# Altium PCB pixhawk_debug_adapter_mini.PcbDoc
Units mm, origin at the board's own origin, x right, y up, seen from the top; angles counter-clockwise.
Board outline 60 x 35 mm, 2 copper layers (Top Layer, Bottom Layer), stack 1.57 mm thick; 25 components, 30 nets, 130 pads, 220 vias.
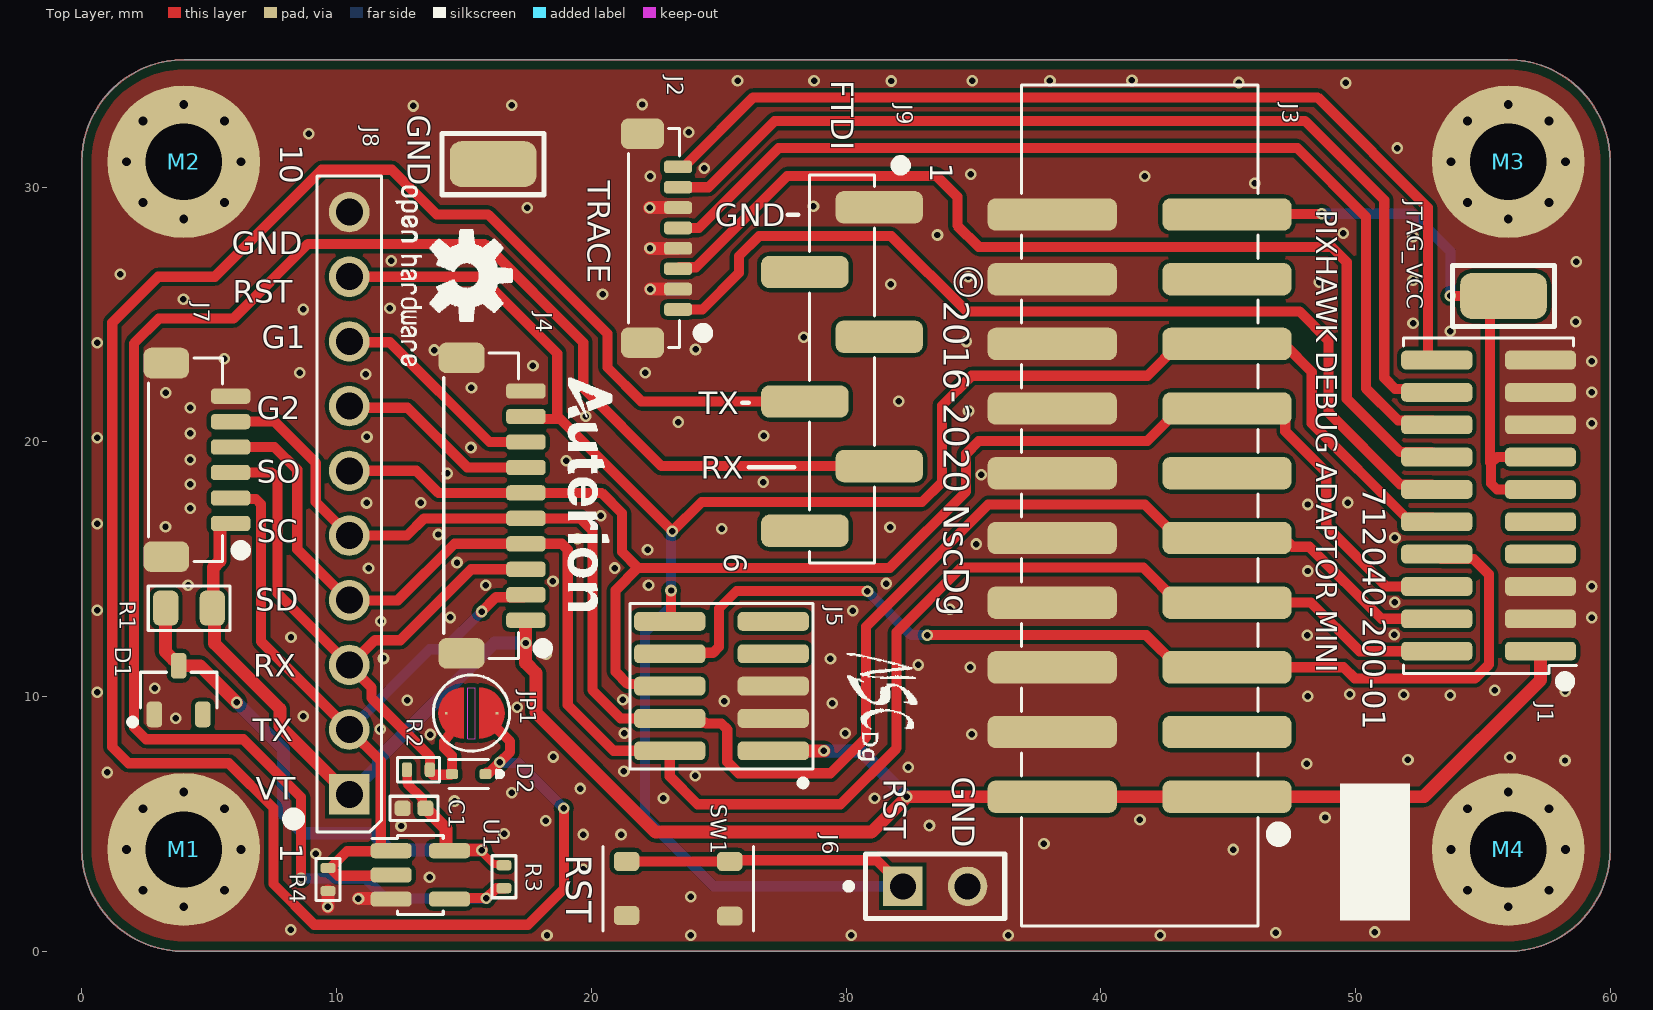
[diagram p0: Top Layer view]
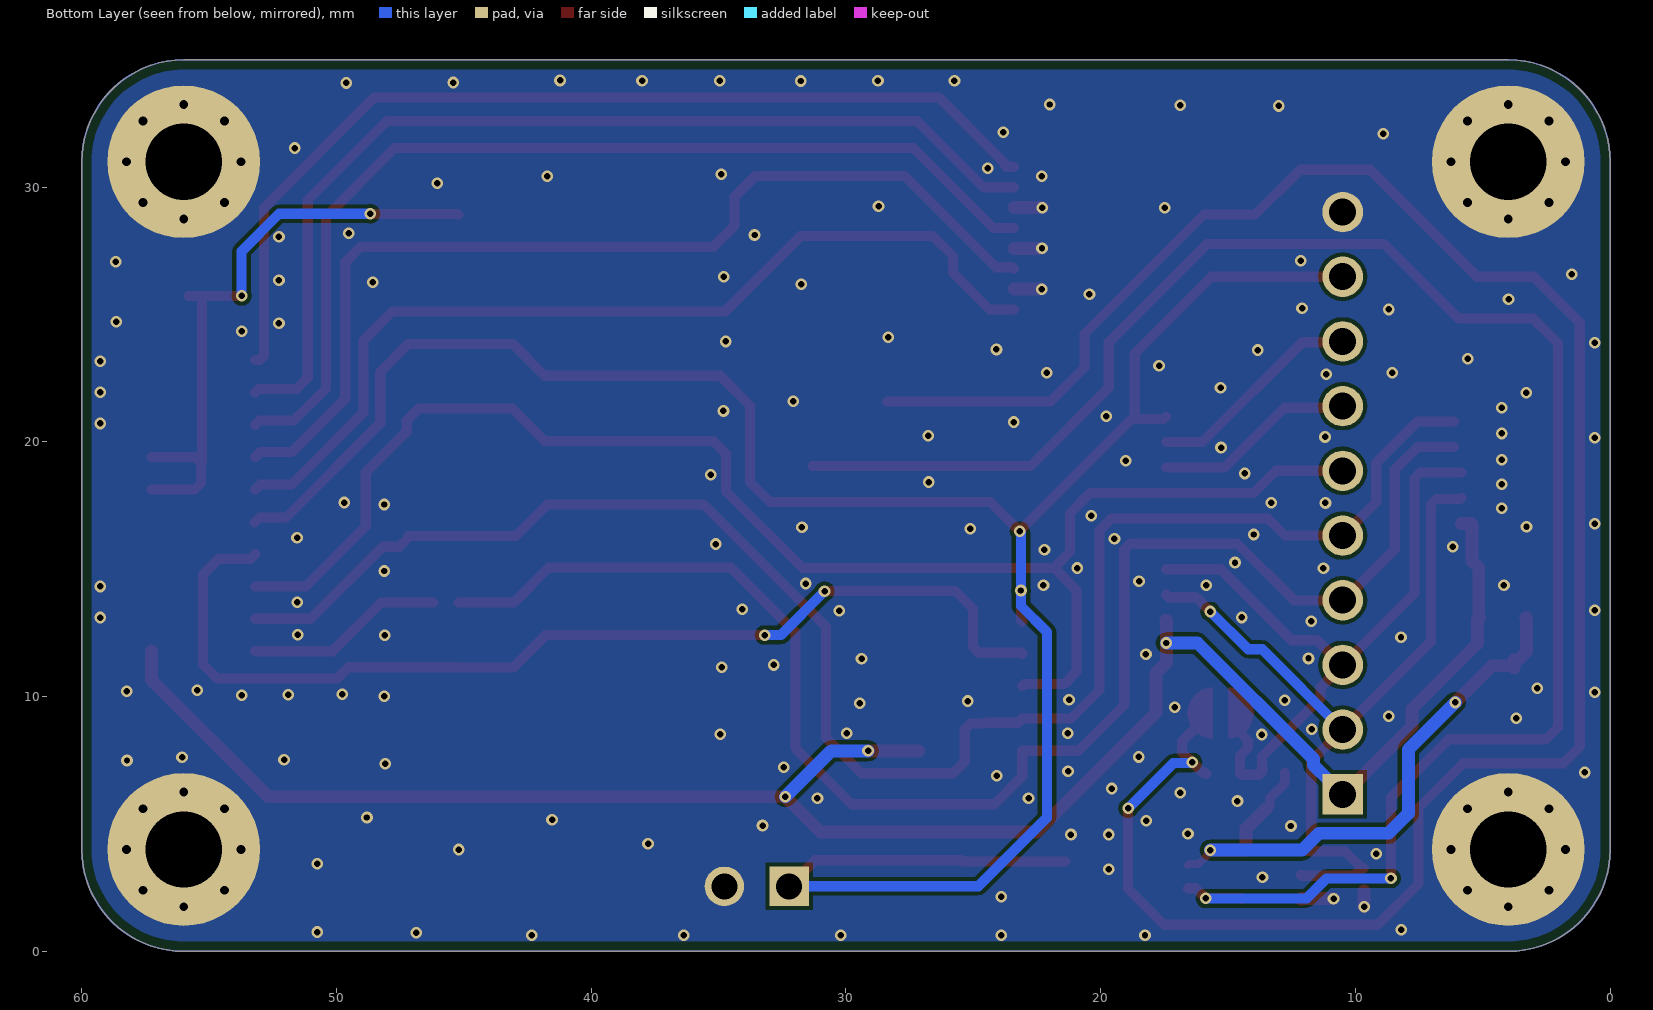
[diagram p1: Bottom Layer view, seen from below]
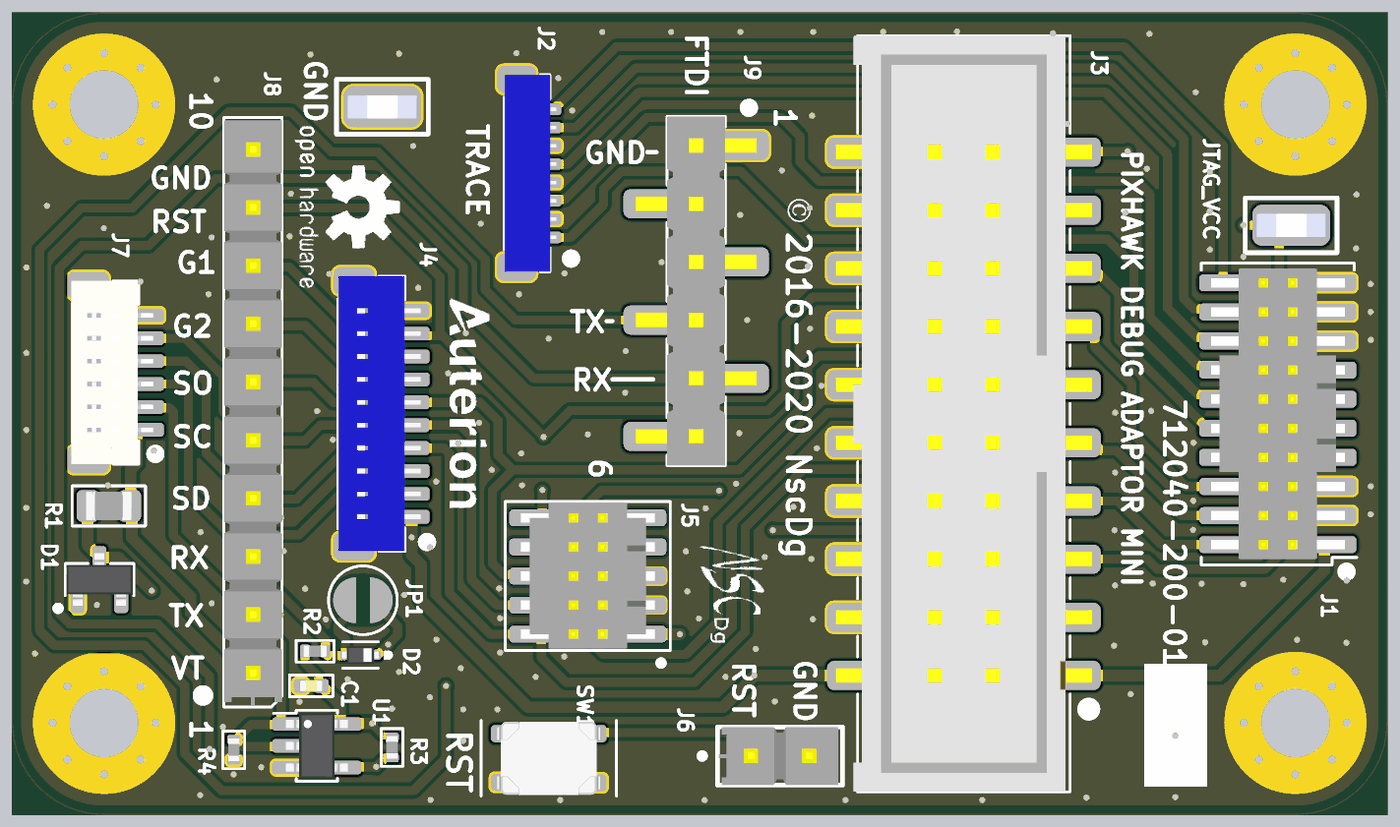
[diagram p2: 3D render of the assembled board from above, using the file's embedded part models]

## Layer stack, top to bottom
Top Solder: solder mask 0.025, Solder Resist, Dk 3.5
Top Layer: signal copper 0.036
Dielectric 1: dielectric 1.498, FR-4, Dk 4.3
Bottom Layer: signal copper 0.036
Bottom Solder: solder mask 0.025, Solder Resist, Dk 3.5

## Board outline
4,0 cw(c4,4) 0,4 0,31 cw(c4,31) 4,35 56,35 cw(c56,31) 60,31 60,4 cw(c56,4) 56,0

## Design rules (kind name [scope] priority, off if disabled: settings)
BoardOutlineClearance [All] p1: gap=0.381 ignorepadtopadclearanceinfootprint=FALSE
Clearance [All] p1: gap=0.152 ignorepadtopadclearanceinfootprint=TRUE
HoleSize [All] p1: absolutevalues=TRUE maxlimit=3.25 minlimit=0.025 maxpercent=80.000 minpercent=20.000
MinimumSolderMaskSliver [All] p1: minsoldermaskwidth=0.09
PolygonConnect PolygonConnect__mount_hole [InNet('GND') vs HasFootprint('MOUNT_HOLE_3MM_8VIA_TH')] p1: connectstyle=Direct reliefconductorwidth=0.3 reliefentries=4 polygonreliefangle="90 Angle" airgapwidth=0.254
PolygonConnect PolygonConnect__via [InNet('GND') vs IsVia] p2: connectstyle=Direct reliefconductorwidth=0.3 reliefentries=4 polygonreliefangle="90 Angle" airgapwidth=0.254
PolygonConnect [All] p3: connectstyle=Direct reliefconductorwidth=0.3 reliefentries=4 polygonreliefangle="90 Angle" airgapwidth=0.254
RoutingVias [All] p1: holewidth=0.305 width=0.508 viastyle="Through Hole" minholewidth=0.254 minwidth=0.457 maxholewidth=0.508 maxwidth=1.016
SilkToSolderMaskClearance [IsPad] p1: minsilkscreentomaskgap=0.1 clearancetoexposedcopper=TRUE
SolderMaskExpansion [All] p1: expansion=0.102 istentingtop=FALSE
UnRoutedNet [All] p1: checkbadconnections=TRUE
Width [All] p1: maxlimit=2.54 minlimit=0.152 preferedwidth=0.305 minimp=50.000000 maximp=50.000000 favimp=50.000000
26 further rules are at their usual default settings.

## Components (designator, comment, footprint, x,y, rotation, side; value= is the part's Value field where it differs from the comment)
C1 "CAP CER 0.1UF 10% 50V X5R 0402" CAPC100X50X56L25N 13.04,5.614 r180 top value=0.1uF
D1 "DIODE ZENER 5.1V 225MW SOT23-3" SOT23-3P95_230X110L30X43N_DIODE 3.799,10.258 r0 top
D2 "DIODE SCHOTTKY 70V 70MA SOD523" SODFL120X80X70L30X30 15.19,6.961 r180 top
GND "TESTPOINT MINIATURE SMD" KSTN-5015 16.145,30.905 r180 top
J1 "CONN_HDR_2X10_VERT_SHROUD_FTSH_1.27MM_SMT" SAMTEC_FTSH-110-01-L-DV-K-TR 55.23,17.5 r90 top locked
J2 "CONN HEADER SUR 8POS .8MM VERT SMT" JST_BM08B-SURS-TFLFSN 22.708,28 r90 top locked
J3 "CONN_HDR_2X10_MALE_2.54MM_SHR_SAMTEC_SMD" SAMTEC_HTST-110-01-F-DV 41.529,17.5 r90 top locked
J4 "CONN HEADER SH 10POS TOP 1MM TIN" JST_BM10B-SRSS-TB 15.67,17.5 r90 top locked
J5 "CONN HEADER 10POS DUAL .05\" SMD" FTSH-105-01-XXX-DV-K 25.112,10.414 r90 top locked
J6 "CONN HEADER 2POS 0.100\" (2.54mm) TH" SMTC-TSW-102-26-XX-S 33.503,2.553 r0 top locked
J7 "CONN HEADER SH 6POS TOP 1MM TIN" JST_BM06B-SRSS-TB 4.064,19.298 r90 top locked
J8 "CONN HEADER 0.100\" (2.54mm) 10POS VERT TH" HDRV10W64P254_10X1_2054X254H851 10.5,6.165 r90 top locked
J9 "CONN HEADER 6POS 0.100\" (2.54mm) SMD" SAMTEC_TSM-106-01-XX-SV 29.845,22.86 r90 top locked
JP1 "JUMPER SHORTING BAR 2MM PAD" SHORTING_JUMPER_2MM 15.298,9.355 r180 top
JTAG_VCC "TESTPOINT MINIATURE SMD" KSTN-5015 55.814,25.731 r180 top
M1 "MOUNT HOLE 3MM 8VIAS THMOUNT_HOLE_3MM_TH" MOUNT_HOLE_3MM_8VIA_TH 4,4 r0 top locked
M2 "MOUNT HOLE 3MM 8VIAS THMOUNT_HOLE_3MM_TH" MOUNT_HOLE_3MM_8VIA_TH 4,31 r0 top locked
M3 "MOUNT HOLE 3MM 8VIAS THMOUNT_HOLE_3MM_TH" MOUNT_HOLE_3MM_8VIA_TH 56,31 r0 top locked
M4 "MOUNT HOLE 3MM 8VIAS THMOUNT_HOLE_3MM_TH" MOUNT_HOLE_3MM_8VIA_TH 56,4 r0 top locked
R1 "RES SMD 68 OHM 1% 1/8W 0805" RESC200X125X70L40N 4.207,13.474 r180 top value=68R
R2 "RES SMD 10K OHM 1% 1/16W 0402" RESC100X50X40L25 13.211,7.131 r0 top value=10K
R3 "RES SMD 10K OHM 1% 1/16W 0402" RESC100X50X40L25 16.571,2.929 r270 top value=10K
R4 "RES SMD 100K OHM 1% 1/16W 0402" RESC100X50X40L25 9.662,2.822 r270 top value=100K
SW1 "SWITCH TACTILE SPST-NO 0.05A 12V SMT" SWITCH_SON4P450_420X320X250L75X100N 23.411,2.457 r270 top locked
U1 "IC GATE AND 1CH 2-INP 5-TSOP" SOT23-5P95_270X145L35X35N 13.289,3 r0 top locked

## Footprints (in the part's own frame and the unit in brackets; to place one, negate y for a bottom-side part, rotate by r counter-clockwise, add the part's x,y. Pads: shape width x height; smd on the part's side, far side on the other; paste and mask are expansions set on the pad)
CAPC100X50X56L25N [mm] "Capacitor Chip 1.00 mm L X 0.50 mm W X 0.56 mm H body"
  rrect49% 0.63x0.61 smd: 1(-0.45,0) 2(0.45,0)
  silkscreen extent -0.95,-0.48 0.95,0.48, body extent -0.5,-0.25 0.5,0.25, height 0.56
FTSH-105-01-XXX-DV-K [mil] "Header Vertical 2X5 Pins 1.27MM Pitch SMD"
  rrect50% 29x110 smd mask+2: 1(-100,-80) 2(-100,80) 3(-50,-80) 4(-50,80) 5(0,-80) 6(0,80) 7(50,-80) 8(50,80) 9(100,-80) 10(100,80)
  silkscreen extent -155,-142 128,142, body extent -125,-115 125,115, height 241
HDRV10W64P254_10X1_2054X254H851 [mm] "Header, Vertical, 2.54 mm pitch; 0.64 mm lead width, 10 pins, 1 row, 10 pins per row, 20.54 mm L X 2.54 mm W X 8.51 mm H body"
  rect 1.59x1.59 / inner round 1.59 / far side rect 1.59x1.59 hole 1.06 paste-1.59: 1(0,0)
  round 1.59 hole 1.06 paste-1.59: 2(2.54,0) 3(5.08,0) 4(7.62,0) 5(10.16,0) 6(12.7,0) 7(15.24,0) 8(17.78,0) 9(20.32,0) 10(22.86,0)
  silkscreen extent -1.48,-1.27 24.28,1.27, body extent -1.38,-1.27 24.15,1.27, height 8.38
JST_BM06B-SRSS-TB [mm] "Header, Vertical Plug; 6 pin, 8.00 mm L X 2.90 mm W X 4.35 mm H body"
  rrect50% 0.6x1.55 smd: 1(-2.5,-1.775) 2(-1.5,-1.775) 3(-0.5,-1.775) 4(0.5,-1.775) 5(1.5,-1.775) 6(2.5,-1.775)
  rrect50% 1.2x1.8 smd: M1(-3.8,0.75) M2(3.8,0.75)
  silkscreen extent -4,-2.38 4,1.45, body extent -4,-2.1 4,1.5, height 4.25
JST_BM08B-SURS-TFLFSN [mm] "Connector, Vertical Shrouded Plug; 10 pin, 9.60 mm L X 2.00 mm W X 2.80 mm H body"
  rrect50% 0.5x1.1 smd: 1(-2.8,-0.7) 2(-2,-0.7) 3(-1.2,-0.7) 4(-0.4,-0.7) 5(0.4,-0.7) 6(1.2,-0.7) 7(2,-0.7) 8(2.8,-0.7)
  rrect50% 1.2x1.7 smd: M1(-4.1,0.7) M2(4.1,0.7)
  silkscreen extent -4.3,-1.88 4.3,1.25, body extent -4.3,-1.03 4.3,1.22, height 2.75
JST_BM10B-SRSS-TB [mm] "Connector, Vertical Shrouded Plug; 12 pin, 12.00 mm L X 2.9mm W X 6.30 mm H body"
  rrect50% 0.6x1.55 smd: 1(-4.5,-1.762) 2(-3.5,-1.762) 3(-2.5,-1.762) 4(-1.5,-1.762) 5(-0.5,-1.762) 6(0.5,-1.762) 7(1.5,-1.762) 8(2.5,-1.762) 9(3.5,-1.762) 10(4.5,-1.762)
  rrect50% 1.2x1.8 smd: M1(-5.8,0.763) M2(5.8,0.763)
  silkscreen extent -6,-2.62 6,1.46, body extent -6,-2.15 6,1.45, height 4.25
KSTN-5015 [mm] "Test Point, Dia 2.7MM x 1.0MM"
  rrect50% 3.4x1.8 smd: 1(0,0)
  silkscreen extent -2,-1.2 2,1.2, body extent -1.56,-0.51 1.56,0.51, height 1.52
MOUNT_HOLE_3MM_8VIA_TH [mm] "MOUNT HOLE 3MM 8VIA TH"
  round 6 hole 3: 1(0,0)
RESC100X50X40L25 [mm] "Resistor, Chip; 1.00 mm L X 0.50 mm W X 0.40 mm H body"
  rrect50% 0.4x0.58 smd: 1(-0.45,0) 2(0.45,0)
  silkscreen extent -0.82,-0.48 0.82,0.48, body extent -0.5,-0.25 0.5,0.25, height 0.4
RESC200X125X70L40N [mm] "Resistor, Chip; 2.00 mm L X 1.25 mm W X 0.70 mm H body"
  rrect51% 0.99x1.38 smd: 1(-0.915,0) 2(0.915,0)
  silkscreen extent -1.6,-0.87 1.6,0.87, body extent -1,-0.63 1,0.63, height 0.7
SAMTEC_FTSH-110-01-L-DV-K-TR [mil] "Connector, Vertical Plug; 20 pin, 12.83 mm L X 5.8 mm W X 10.29 mm H body"
  rrect50% 29.02x110 smd: 1(-225,-80.16) 2(-225,80.16) 3(-175,-80.16) 4(-175,80.16) 5(-125,-80.16) 6(-125,80.16) 7(-75,-80.16) 8(-75,80.16) 9(-25,-80.16) 10(-25,80.16) 11(25,-80.16) 12(25,80.16) 13(75,-80.16) 14(75,80.16) 15(125,-80.16) 16(125,80.16) 17(175,-80.16) 18(175,80.16) 19(225,-80.16) 20(225,80.16)
  silkscreen extent -280,-136 259,131, body extent -250,-115 250,115, height 241
SAMTEC_HTST-110-01-F-DV [mm] "Connector, Vertical Shrouded Plug; 20 pin, 33.02 mm L X 9.27 mm W X 10.41 mm H body"
  rrect50% 1.27x5.08 smd: 1(-11.43,-3.43) 2(-11.43,3.43) 3(-8.89,-3.43) 4(-8.89,3.43) 5(-6.35,-3.43) 6(-6.35,3.43) 7(-3.81,-3.43) 8(-3.81,3.43) 9(-1.27,-3.43) 10(-1.27,3.43) 11(1.27,-3.43) 12(1.27,3.43) 13(3.81,-3.43) 14(3.81,3.43) 15(6.35,-3.43) 16(6.35,3.43) 17(8.89,-3.43) 18(8.89,3.43) 19(11.43,-3.43) 20(11.43,3.43)
  silkscreen extent -16.51,-5.7 16.51,4.64, body extent -16.51,-5.59 16.51,5.59, height 10.16
SAMTEC_TSM-106-01-XX-SV [mil] "Header, Vertical Plug; 6 pin, 15.24 mm L X 2.54 mm W X 8.382 mm H body"
  rrect50% 50x135 smd: 1(250,-57.5) 2(150,57.5) 3(50,-57.5) 4(-50,57.5) 5(-150,-57.5) 6(-250,57.5)
  silkscreen extent -300,-98 323,50, body extent -300,-104 300,104, height 379
SHORTING_JUMPER_2MM [mm] "SHORTING JUMPER PADS 2MM SMD"
  rect 0.1x0.1 smd paste+0 mask+0: 1(-1,0) 2(1,0)
  Top Layer region: -0.3,1 -0.3,-1 -0.683,-0.924 -1.007,-0.707 -1.224,-0.383 -1.3,0 -1.3,0 -1.224,0.383 -1.007,0.707 -0.683,0.924 -0.3,1
  Top Layer region: 0.3,1 0.683,0.924 1.007,0.707 1.224,0.383 1.3,0 1.3,0 1.224,-0.383 1.007,-0.707 0.683,-0.924 0.3,-1 0.3,-1
  Top Layer keep-out lines w0.025: 0.15,1 -0.15,1 -0.15,-1 0.15,-1 0.15,1
  silkscreen extent -1.5,-1.5 1.5,1.5
SMTC-TSW-102-26-XX-S [mm] ".025 SQ Post Terminal Strip Assembly, 1x2 Pins, Vertical, 2.54mm Pitch, Male TH"
  rect 1.55x1.55 hole 1.02: 1(-1.27,0)
  round 1.55 hole 1.02: 2(1.27,0)
  silkscreen extent -3.52,-1.27 2.73,1.27, body extent -2.67,-1.27 2.54,1.27, height 8.38
SODFL120X80X70L30X30 [mm] "Diode Small Outline Diode Flat Lead SODFL 1.20 mm L X 0.80 mm W X 0.70 mm H"
  rrect50% 0.48x0.4 smd: A(0.66,0) C(-0.66,0)
  silkscreen extent -1.32,-0.58 0.77,0.58, body extent -0.8,-0.4 0.8,0.4, height 0.7
SOT23-3P95_230X110L30X43N_DIODE [mm] "Small Outline Transistor (SOT23), 0.95 mm pitch; 3 pin, 2.90 mm L X 1.30 mm W X 1.10 mm H body"
  rrect49% 0.61x1.01 smd: 1(-0.95,-0.955) 2(0.95,-0.955) 3(0,0.955)
  silkscreen extent -1.93,-1.38 1.5,0.7, body extent -1.45,-1.15 1.45,1.15, height 1.1
SOT23-5P95_270X145L35X35N [mm] "Small Outline Transistor (SOT23), 0.95 mm pitch; 5 pin, 2.90 mm L X 1.55 mm W X 1.45 mm H body"
  rrect51% 1.61x0.59 smd: 1(-1.145,0.95) 2(-1.145,0) 3(-1.145,-0.95) 4(1.145,-0.95) 5(1.145,0.95)
  silkscreen extent -1.89,-1.55 0.9,1.55, body extent -1.35,-1.45 1.35,1.45, height 1.45
SWITCH_SON4P450_420X320X250L75X100N [mm] "Small Outline No-Lead (SON), 4.50 mm pitch; 4 pin, 4.20 mm L X 3.20 mm W X 2.50 mm H body"
  rrect48% 0.75x1 smd: 1(-1.075,2.025) 2(-1.075,-2.025) 3(1.075,2.025) 4(1.05,-2.025)
  silkscreen extent -1.65,-2.96 1.65,2.96, body extent -1.6,-2.25 1.6,2.25, height 2.5

## Part data
C1: library part CAP_0U1_50V_X5R_0402, Manufacturer="Murata Electronics North America", Manufacturer Part Number=GRM155R61H104KE19D, Operating Temperature="-55°C ~ 85°C", Supplier Part Number 1=490-11917-1-ND, Tolerance=±10%, Voltage - Rated=50V, Category=Capacitors, ComponentLink1Description=https://www.digikey.com/products/en/capacitors/ceramic-capacitors/60?k=GRM155R61H104KE19D&k=&pkeyword=GRM155R61H104KE19D&pv7=2&sf=0&quantity=&ColumnSort=0&page=1&pageSize=25, ComponentLink1URL=https://www.digikey.com/products/en/capacitors/ceramic-capacitors/60?k=GRM155R61H104KE19D&k=&pkeyword=GRM155R61H104KE19D&pv7=2&sf=0&quantity=&ColumnSort=0&page=1&pageSize=25, Packaging="Cut Tape (CT)", Part Status=Active, Pricing 1="1=0.1, 10=0.065, 100=0.0292, 500=0.02082, 1000=0.01637, 2500=0.01488, 5000=0.01369 (USD)", Stock 1=1608921, Supplier 1=Digi-Key
D1: library part DIODE_ZENER_5.1V_SOT23-3, Manufacturer="ON Semiconductor", Manufacturer Part Number=BZX84C5V1LT3G, Operating Temperature="-65°C ~ 150°C (TJ)", Supplier Part Number 1=BZX84C5V1LT3GOSCT-ND, Category="Circuit Protection", ComponentLink1Description=https://www.digikey.com/product-detail/en/on-semiconductor/BZX84C5V1LT3G/BZX84C5V1LT3GOSCT-ND/3462252, ComponentLink1URL=https://www.digikey.com/product-detail/en/on-semiconductor/BZX84C5V1LT3G/BZX84C5V1LT3GOSCT-ND/3462252, ID="5.1V 6%", Packaging="Cut Tape (CT)", Part Status=Active, Pricing 1="1= 0.13 (USD)", Stock 1=21912, Supplier 1=Digi-Key
D2: library part DIODE_SCHOTTKY_BAS70_SOD523_SMT, Current=70mA, Manufacturer=STMicroelectronics, Manufacturer Part Number=BAS70KFILM, Supplier Part Number 1=497-5695-1-ND, Voltage=70V, Category="Discrete Semiconductor Products", ComponentLink1Description=https://www.digikey.com/product-detail/en/stmicroelectronics/BAS70KFILM/497-5695-1-ND/1299948, ComponentLink1URL=https://www.digikey.com/product-detail/en/stmicroelectronics/BAS70KFILM/497-5695-1-ND/1299948, Packaging="Cut Tape (CT)", Part Status=Active, Pricing 1="1=0.28, 10=0.23, 100=0.122, 500=0.08028, 1000=0.05459 (USD)", Stock 1=20067, Supplier 1=Digi-Key
GND JTAG_VCC: library part TESTPOINT_MINIATURE_SMD, Manufacturer="Keystone Electronics", Manufacturer Part Number=5015, Supplier Part Number 1=36-5015CT-ND, Category="Test and Measurement", ComponentLink1Description=https://www.digikey.com/product-detail/en/keystone-electronics/5015/36-5015CT-ND/278886, ComponentLink1URL=https://www.digikey.com/product-detail/en/keystone-electronics/5015/36-5015CT-ND/278886, Supplier 1=Digi-Key
J1: library part CONN_HDR_2X10_SHROUD_1.27MM_SMT, Manufacturer="Samtec Inc.", Manufacturer Part Number=FTSH-110-01-L-DV-K-TR, Operating Temperature="-55°C ~ 125°C", Supplier Part Number 1=SAM13960CT-ND, Category="Connectors, Interconnects", ComponentLink1Description=https://www.digikey.com/products/en/connectors-interconnects/rectangular-connectors-headers-male-pins/314?k=FTSH-110-01-L-DV-K&k=&pkeyword=FTSH-110-01-L-DV-K&sv=0&pv5=362515&sf=0&FV=-8%7C314%2C7%7C2&quantity=&ColumnSort=0&page=1&pageSize=25, ComponentLink1URL=https://www.digikey.com/products/en/connectors-interconnects/rectangular-connectors-headers-male-pins/314?k=FTSH-110-01-L-DV-K&k=&pkeyword=FTSH-110-01-L-DV-K&sv=0&pv5=362515&sf=0&FV=-8%7C314%2C7%7C2&quantity=&ColumnSort=0&page=1&pageSize=25, Packaging="Cut Tape (CT)", Part Status=Active, Pricing 1="1=5.36 (USD)", Stock 1=73, Supplier 1=Digi-Key, System=Connector
J2: library part CONN_JST_SUR_8PIN_VERT_SMT, Manufacturer="JST Sales America Inc.", Manufacturer Part Number=BM08B-SURS-TF(LF)(SN), Operating Temperature="-25°C ~ 85°C", Supplier Part Number 1=455-3578-1-ND, Voltage - Rated=30V, Category="Connectors, Interconnects", ComponentLink1Description=https://www.digikey.com/products/en/connectors-interconnects/rectangular-connectors-headers-male-pins/314?k=bm08bsur&k=&pkeyword=bm08bsur&sv=0&pv7=2&sf=0&quantity=&ColumnSort=0&page=1&pageSize=25, ComponentLink1URL=https://www.digikey.com/products/en/connectors-interconnects/rectangular-connectors-headers-male-pins/314?k=bm08bsur&k=&pkeyword=bm08bsur&sv=0&pv7=2&sf=0&quantity=&ColumnSort=0&page=1&pageSize=25, Packaging="Tape & Reel (TR)", Part Status=Active, Pricing 1="1=0.73 (USD)", Stock 1=2227, Supplier 1=Digi-Key, System=Connector
J3: Manufacturer="Samtec Inc.", Manufacturer Part Number=HTST-110-01-L-DV, Operating Temperature="-65°C ~ 125°C", Supplier Part Number 1=SAM10529-ND, Category="Connectors, Interconnects", ComponentLink1Description=https://www.digikey.com/product-detail/en/samtec-inc/HTST-110-01-L-DV/SAM10529-ND/6468733, ComponentLink1URL=https://www.digikey.com/product-detail/en/samtec-inc/HTST-110-01-L-DV/SAM10529-ND/6468733, Packaging=Tray, Part Status=Active, Pricing 1="1=2.60 (USD)", Stock 1=118, Supplier 1=Digi-Key, System=Connector
J4: library part CONN_JST_SH_10PIN_VERT_SMT, Manufacturer="JST Sales America Inc.", Manufacturer Part Number=BM10B-SRSS-TB(LF)(SN), Operating Temperature="-25°C ~ 85°C", Supplier Part Number 1=455-1796-1-ND, Voltage - Rated=50V, Category="Connectors, Interconnects", ComponentLink1Description=https://www.digikey.com/products/en/connectors-interconnects/rectangular-connectors-headers-male-pins/314?k=bm10b-srss&k=&pkeyword=bm10b-srss&pv1989=0&sf=0&FV=ffe0013a%2C1c0002&quantity=&ColumnSort=0&page=1&pageSize=25, ComponentLink1URL=https://www.digikey.com/products/en/connectors-interconnects/rectangular-connectors-headers-male-pins/314?k=bm10b-srss&k=&pkeyword=bm10b-srss&pv1989=0&sf=0&FV=ffe0013a%2C1c0002&quantity=&ColumnSort=0&page=1&pageSize=25, Packaging="Cut Tape (CT)", Part Status=Active, Pricing 1="1=1.06, 10=9.32, 100=0.8037, 500=0.65758, 1000=0.58452 (USD)", Stock 1=62595, Supplier 1=Digi-Key, System=Connector
J5: library part CONN_HDR_2X5_MALE_1.27MM_SMT, Manufacturer="Samtec Inc.", Manufacturer Part Number=FTSH-105-01-F-DV-K, Operating Temperature="-55°C ~ 125°C", Supplier Part Number 1=SAM8796-ND, Category="Connectors, Interconnects", Packaging=Tube, Part Status=Active, Pricing 1="1=2.9, 10=2.784, 100=2.32, 500=1.972, 1000=1.682, 5000=1.508 (USD)", Stock 1=30769, Supplier 1=Digi-Key, System=Connector
J6: library part CONN_HDR_1X2_MALE_2.54MM_TH, Manufacturer="Samtec Inc.", Manufacturer Part Number=TSW-102-26-T-S, Operating Temperature="-55°C ~ 105°C", Supplier Part Number 1=TSW-102-26-T-S-ND, Category="Connectors, Interconnects", ComponentLink1Description=https://www.digikey.com/product-detail/en/samtec-inc/TSW-102-26-T-S/TSW-102-26-T-S-ND/6691583, ComponentLink1URL=https://www.digikey.com/product-detail/en/samtec-inc/TSW-102-26-T-S/TSW-102-26-T-S-ND/6691583, Packaging=Bulk, Part Status=Active, Pricing 1="1=0.22 (USD)", Stock 1=0, Supplier 1=Digi-Key, System=Connector
J7: library part CONN_JST_SH_6PIN_VERT_SMT, Manufacturer="JST Sales America Inc.", Manufacturer Part Number=BM06B-SRSS-TB(LF)(SN), Operating Temperature="-25°C ~ 85°C", Supplier Part Number 1=455-2875-1-ND, Voltage - Rated=50V, Category="Connectors, Interconnects", ComponentLink1Description=https://www.digikey.com/products/en/connectors-interconnects/rectangular-connectors-headers-male-pins/314?k=bm06b-srss&k=&pkeyword=bm06b-srss&sv=0&pv5=15518&sf=0&FV=1c0002%2Cffe0013a%2C1f140000&quantity=&ColumnSort=0&page=1&pageSize=25, ComponentLink1URL=https://www.digikey.com/products/en/connectors-interconnects/rectangular-connectors-headers-male-pins/314?k=bm06b-srss&k=&pkeyword=bm06b-srss&sv=0&pv5=15518&sf=0&FV=1c0002%2Cffe0013a%2C1f140000&quantity=&ColumnSort=0&page=1&pageSize=25, Packaging="Cut Tape (CT)", Part Status=Active, Pricing 1="1=0.76, 10=0.672, 100=0.5797, 500=0.47428 (USD)", Stock 1=72375, Supplier 1=Digi-Key, System=Connector
J8: library part CONN_HDR_1X10_MALE_2.54MM_TH, Manufacturer=Samtec, Manufacturer Part Number=TSW-110-07-F-S, Operating Temperature="-55°C ~ 125°C", Supplier Part Number 1=SAM10351-ND, Category="Connectors, Interconnects", ComponentLink1Description=https://www.digikey.com/product-detail/en/samtec-inc/TSW-110-07-F-S/SAM10351-ND/6679088, ComponentLink1URL=https://www.digikey.com/product-detail/en/samtec-inc/TSW-110-07-F-S/SAM10351-ND/6679088, Packaging=Bulk, Part Status=Active, Pricing 1="1=0.56, 10=0.525 (USD)", Stock 1=4178, Supplier 1=Digi-Key, System=Connector
J9: library part CONN_HDR_1X6_MALE_2.54MM_SMD, Manufacturer=Samtec, Manufacturer Part Number=TSM-106-01-L-SV-P-TR, Operating Temperature="-55°C ~ 125°C", Supplier Part Number 1=SAM14846CT-ND, Category="Connectors, Interconnects", ComponentLink1Description=https://www.digikey.com/products/en/connectors-interconnects/rectangular-connectors-headers-male-pins/314?k=&pkeyword=&sv=0&pv1792=64614&sf=1&FV=28%7C353507%2C69%7C409393%2C88%7C249730%2C90%7C39665%2C512%7C371353%2C1790%7C9726%2C1791%7C350796%2C1989%7C0%2C2011%7C406666%2C2021%7C417859%2C-8%7C314%2C-1%7C612%2C7%7C2%2C2025%7C15230&quantity=&ColumnSort=0&page=1&pageSize=25, ComponentLink1URL=https://www.digikey.com/products/en/connectors-interconnects/rectangular-connectors-headers-male-pins/314?k=&pkeyword=&sv=0&pv1792=64614&sf=1&FV=28%7C353507%2C69%7C409393%2C88%7C249730%2C90%7C39665%2C512%7C371353%2C1790%7C9726%2C1791%7C350796%2C1989%7C0%2C2011%7C406666%2C2021%7C417859%2C-8%7C314%2C-1%7C612%2C7%7C2%2C2025%7C15230&quantity=&ColumnSort=0&page=1&pageSize=25, Packaging="Cut Tape (CT)", Part Status=Active, Pricing 1="1=1.57 (USD)", Stock 1=78, Supplier 1=Digi-Key, System=Connector
JP1: library part JUMPER_SHORTING_BAR_2MM_PAD, Category=Mechanical, Parameter="2MM PAD"
M1 M2 M3 M4: library part MOUNT_HOLE_3MM_8VIAS_TH, "MOUNT HOLE 3MM 8VIAS TH", Category=Mechanical
R1: library part RES_68R_1%_1/8W_0805, Manufacturer=Yageo, Manufacturer Part Number=RC0805FR-0768RL, Operating Temperature="-55°C ~ 155°C", Power=1/8W, Supplier Part Number 1=311-68.0CRCT-ND, Tolerance=±1%, Category=Resistors, ComponentLink1Description=https://www.digikey.com/products/en/resistors/chip-resistor-surface-mount/52?k=&pkeyword=&sv=0&pv2=3&sf=0&FV=fffc000d%2C1c0002%2C1f140000%2Cmu68+Ohms%7C2085%2Cffe00034%2Cffec1104%2Cc0001%2C14203b%2C2b80016&quantity=&ColumnSort=0&page=1&pageSize=25, ComponentLink1URL=https://www.digikey.com/products/en/resistors/chip-resistor-surface-mount/52?k=&pkeyword=&sv=0&pv2=3&sf=0&FV=fffc000d%2C1c0002%2C1f140000%2Cmu68+Ohms%7C2085%2Cffe00034%2Cffec1104%2Cc0001%2C14203b%2C2b80016&quantity=&ColumnSort=0&page=1&pageSize=25, Packaging="Cut Tape (CT)", Part Status=Active, Pricing 1="1=0.1, 10=0.022, 100=0.0088, 1000=0.00396, 2500=0.00344 (USD)", Stock 1=9649084, Supplier 1=Digi-Key
R2 R3: library part RES_10K_1%_1/16W_0402, Manufacturer=Yageo, Manufacturer Part Number=RC0402FR-0710KL, Operating Temperature="-55°C ~ 155°C", Power=1/16W, Supplier Part Number 1=311-10.0KLRCT-ND, Tolerance=±1%, Category=Resistors, ComponentLink1Description=https://www.digikey.com/products/en?keywords=311-10.0KLRCT-ND, ComponentLink1URL=https://www.digikey.com/products/en?keywords=311-10.0KLRCT-ND, Packaging="Cut Tape (CT)", Part Status=Active, Pricing 1="1=0.1, 10=0.014, 100=0.0056, 1000=0.00253, 2500=0.0022, 5000=0.00181 (USD)", Stock 1=37996194, Supplier 1=Digi-Key
R4: library part RES_100K_1%_1/16W_0402, Manufacturer=Yageo, Manufacturer Part Number=RC0402FR-07100KL, Operating Temperature="-55°C ~ 155°C", Power=1/16W, Supplier Part Number 1=311-100KLRCT-ND, Tolerance=±1%, Category=Resistors, ComponentLink1Description=https://www.digikey.com/products/en/resistors/chip-resistor-surface-mount/52?k=RC0402FR-07100KL&k=&pkeyword=RC0402FR-07100KL&pv7=2&sf=0&quantity=&ColumnSort=0&page=1&pageSize=25, ComponentLink1URL=https://www.digikey.com/products/en/resistors/chip-resistor-surface-mount/52?k=RC0402FR-07100KL&k=&pkeyword=RC0402FR-07100KL&pv7=2&sf=0&quantity=&ColumnSort=0&page=1&pageSize=25, Packaging="Cut Tape (CT)", Part Status=Active, Pricing 1="1=0.1, 10=0.014, 100=0.0056, 1000=0.00253, 2500=0.0022, 5000=0.00181 (USD)", Stock 1=16720425, Supplier 1=Digi-Key
SW1: library part SWITCH_SPST_OFF_MOM_NO_SMT, Manufacturer=E-Switch, Manufacturer Part Number=TL3365AF180QG, Operating Temperature="-20°C ~ 70°C", Supplier Part Number 1=EG5384CT-ND, Voltage - Rated="0.05A @ 12VDC", Category=Switches, ComponentLink1Description=https://www.digikey.com/product-detail/en/e-switch/TL3365AF180QG/EG5384CT-ND/5964420, ComponentLink1URL=https://www.digikey.com/product-detail/en/e-switch/TL3365AF180QG/EG5384CT-ND/5964420, ComponentLink2Description=https://www.mouser.com/ProductDetail/ALPS/SKRPABE010?qs=%2fha2pyFaduiSGOmjM3i%252bt9v%2fAzS%2f%2fo3A%2fnB8kYeCJaQ%3d, ComponentLink2URL=https://www.mouser.com/ProductDetail/ALPS/SKRPABE010?qs=%2fha2pyFaduiSGOmjM3i%252bt9v%2fAzS%2f%2fo3A%2fnB8kYeCJaQ%3d, Packaging="Cut Tape (CT)", Part Status=Active, Pricing 1="1=0.34, 10=0.333, 25=0.3208, 50=0.3088, 100=0.297, 250=0.27324, 500=0.2376, 1000=0.20196 (USD)", Stock 1=73674, Supplier 1=Digi-Key
U1: library part IC_GATE_SINGLE_AND_OPEN_DRAIN_5-TSOP, Manufacturer="ON Semiconductor", Manufacturer Part Number=MC74VHC1G09DTT1G, Operating Temperature="-55°C ~ 125°C", Supplier Part Number 1=MC74VHC1G09DTT1GOSCT-ND, Category="Integrated Circuits (ICs)", ComponentLink1Description=https://www.digikey.com/product-detail/en/on-semiconductor/MC74VHC1G09DTT1G/MC74VHC1G09DTT1GOSCT-ND/2120980, ComponentLink1URL=https://www.digikey.com/product-detail/en/on-semiconductor/MC74VHC1G09DTT1G/MC74VHC1G09DTT1GOSCT-ND/2120980, ID="OPEN DRAIN AND", Packaging="Cut Tape (CT)", Part Status=Active, Pricing 1="1=0.34, 10=0.28, 100=0.1485, 500=0.09772, 1000=0.06645 (USD)", Stock 1=5436, Supplier 1=Digi-Key

## Via types
v1: diameter 0.457, hole 0.254, Top Layer to Bottom Layer, tented both sides, 188 vias
v2: diameter 0.75, hole 0.35, Top Layer to Bottom Layer, tented top, 32 vias

## Nets (pads, with @x,y where several pads share a name; then routed paths per layer and width w, separated by ;. In a path a pad name is that pad's centre, name@x,y a point inside that pad or via, vN(x,y) a via of type N, cw(c..) or ccw(c..) an arc to the next point about the centre after c; other vN are vias at no path point)
--: J1.7
DBGRQ: J3.17
GND: C1.2 D1.1 GND.1 J1.3 J1.5 J1.15 J1.17 J1.19 J2.2 J2.4 J2.6 J2.M1 J2.M2 J3.4 J3.6 J3.8 J3.10 J3.12 J3.14 J3.16 J3.18 J3.20 J4.10 J4.M1 J4.M2 J5.3 J5.5 J6.2 J7.6 J7.M1 J7.M2 J8.10 J9.1 M1.1 M2.1 M3.1 M4.1 R4.2 SW1.3 SW1.4 U1.3 | length 5.2
  Top Layer w0.508: v1@9.662,1.75 R4.2 ; v1(10.859,2.069) 10.864,2.074 12.12,2.074 U1.3 ; v1(22.293,29.193) 22.296,29.196 23.404,29.196 J2.6 ; v1@22.316,27.6 J2.4 ; v1@22.327,26 J2.2
  other v1: 18.261,0.635 23.909,0.627 30.21,0.627 36.364,0.631 42.331,0.631 46.878,0.737 50.76,0.759 8.198,0.844 9.651,1.747 23.909,2.139 13.65,2.912 19.683,3.218 50.757,3.439 9.186,3.827 45.202,3.997 37.771,4.228 19.681,4.585 21.167,4.585 16.575,4.62 12.531,4.921 33.278,4.939 18.219,5.125 41.541,5.174 48.806,5.255 14.631,5.902 22.834,6.009 31.121,6.012 16.875,6.229 19.568,6.392 24.083,6.897 0.99,7.023 21.282,7.072 32.447,7.227 48.085,7.37 58.228,7.494 52.063,7.52 18.51,7.632 56.068,7.622 13.677,8.513 34.935,8.525 21.288,8.563 29.965,8.558 11.713,8.716 3.687,9.153 8.693,9.224 17.1,9.588 29.459,9.747 25.219,9.827 12.773,9.858 21.243,9.881 48.126,10.011 53.728,10.061 49.773,10.089 51.902,10.073 0.61,10.169 58.239,10.214 55.468,10.257 2.864,10.324 34.876,11.158 32.831,11.245 29.39,11.492 11.842,11.5 18.223,11.669 8.211,12.333 48.104,12.417 51.531,12.427 11.731,12.958 14.458,13.108 59.284,13.106 30.261,13.366 0.61,13.388 34.077,13.436 51.54,13.701 59.284,14.326 4.168,14.368 15.85,14.368 22.247,14.372 31.584,14.441 18.496,14.533 48.13,14.933 11.255,15.035 20.921,15.048 14.728,15.265 22.21,15.769 6.178,15.891 35.109,15.99 19.461,16.203 51.552,16.232 13.985,16.365 25.115,16.592 31.73,16.645 3.284,16.677 0.61,16.791 20.372,17.104 4.26,17.394 48.13,17.544 11.176,17.605 13.301,17.616 49.699,17.621 4.249,18.34 26.745,18.425 35.316,18.718 14.338,18.762 19.02,19.263 4.249,19.297 15.277,19.781 0.61,20.159 11.194,20.196 26.768,20.238 4.251,20.332 59.284,20.726 23.411,20.781 19.787,21.015 34.812,21.217 4.249,21.34 32.07,21.592 3.299,21.936 59.284,21.946 15.295,22.122 11.145,22.661 8.56,22.715 22.113,22.715 17.71,22.997 59.284,23.165 5.589,23.269 13.834,23.606 24.093,23.631 0.61,23.888 34.716,23.945 28.336,24.113 53.728,24.351 52.263,24.666 58.646,24.717 8.693,25.2 12.095,25.251 3.989,25.605 20.443,25.796 22.316,25.997 31.757,26.184 48.574,26.267 52.263,26.352 34.8,26.485 1.513,26.578 58.663,27.073 12.153,27.112 22.305,27.597 52.263,28.053 33.592,28.124 49.521,28.198 17.492,29.191 28.723,29.254 46.041,30.157 22.316,30.435 41.724,30.435 34.902,30.511 24.435,30.742 51.646,31.537 8.914,32.097 23.821,32.158 13.009,33.19 16.878,33.216 21.996,33.247 49.625,34.094 45.413,34.11 25.741,34.173 28.746,34.173 31.777,34.17 34.96,34.173 38.007,34.176 41.226,34.192
  other v2: 4,1.75 56,1.75 2.4,2.4 5.6,2.4 54.4,2.4 57.6,2.4 1.75,4 6.25,4 53.75,4 58.25,4 2.4,5.6 5.6,5.6 54.4,5.6 57.6,5.6 4,6.25 56,6.25 4,28.75 56,28.75 2.4,29.4 5.6,29.4 54.4,29.4 57.6,29.4 1.75,31 6.25,31 53.75,31 58.25,31 2.4,32.6 5.6,32.6 54.4,32.6 57.6,32.6 4,33.25 56,33.25
GNDDetect1: J5.9
GPIO1: J4.7 J8.7 | length 7.9
  Top Layer w0.4: J8.7 10.565,21.34 12.787,21.34 15.127,19 J4.7
GPIO2: J4.8 J8.8 | length 8.6
  Top Layer w0.4: J8.8 10.534,23.912 12.09,23.912 16.002,20 J4.8
HOST_CTS: J9.2
HOST_RTS: J9.6
HOST_RXD: J9.5 R3.2 U1.4 | length 71.4
  Top Layer w0.4: v1(8.605,2.864) 8.605,6.057 6.337,8.325 2.521,8.325 2.045,8.8 2.045,23.869 3.018,24.841 5.944,24.841 8.878,27.775 15.811,27.775 19.681,23.905 19.681,22.124 22.755,19.05 J9.5 ; U1.4 14.473,2.089 15.868,2.089 v1(15.879,2.078) 16.279,2.479 R3.2
  Bottom Layer w0.4: v1(8.605,2.864) 11.123,2.864 11.908,2.078 v1(15.879,2.078)
HOST_TXD: D2.C J9.4 JP1.1 | length 83.4
  Top Layer w0.4: D2.C 15.898,7.008 15.994,7.008 v1(16.403,7.418) 16.813,7.827 16.813,8.236 16.211,8.838 16.211,8.887 16.167,9.02 16.255,9.164 16.351,9.322 ; v1(18.923,5.617) 18.923,2.448 17.517,1.043 9.125,1.043 7.523,2.645 7.523,5.628 5.764,7.388 1.829,7.388 1.191,8.026 1.191,24.678 2.998,26.485 5.217,26.485 9.421,30.689 12.17,30.689 13.929,28.93 15.949,28.93 20.635,24.244 20.635,22.919 21.963,21.592 28.383,21.592 J9.4
  Bottom Layer w0.4: v1(16.403,7.418) 16.43,7.391 17.149,7.391 v1(18.923,5.617)
HOST_VDD: J9.3
KEY1: J5.7
NC: J1.9
nRESET: J1.10 J3.15 J4.9 J5.10 J6.1 J8.9 SW1.1 SW1.2 | length 94
  Top Layer w0.4: J8.9 15.652,26.485 18.663,23.474 18.663,21 ; J4.9 17.533,20.9 18.782,20.9 ; 18.682,21 23.179,16.503 v1(23.179,16.49) 24.331,17.642 32.985,17.642 33.767,18.423 33.767,21.43 34.935,22.599 41.839,22.599 43.09,23.85 47.182,23.85 48.286,22.746 48.286,20.734 51.986,17.034 53.025,17.034 J1.10@53.223,16.836 ; SW1.2 SW1.1 25.481,3.577 31.209,3.577 J6.1 ; J5.10 23.141,13.015 23.132,13.023 v1(23.132,14.167)
  Bottom Layer w0.4: v1(23.179,16.49) 23.132,16.443 v1(23.132,14.167) 23.132,13.561 22.113,12.542 22.113,5.244 24.804,2.553 J6.1
nTRST: J3.3
RTCK: J3.11
SWCLK/TCLK: J1.4 J3.9 J4.5 J5.4 J7.5 J8.5 | length 67.5
  Top Layer w0.4: J7.5@6.135,20.798 7.566,20.798 9.185,19.178 9.185,17.64 J8.5 10.571,16.254 10.642,16.325 12.767,16.325 13.442,17 J4.5 19.568,17 20.042,16.526 20.042,10.261 21.159,9.144 J5.4 23.249,8.976 24.484,8.976 24.512,8.948 25.106,8.948 25.341,8.713 25.341,7.44 25.787,6.994 29.389,6.994 30.788,8.393 30.788,12.751 35.581,17.544 41.727,17.544 42.965,16.307 J3.9@47.195,16.307 ; J3.9@47.195,16.23 47.54,15.884 48.193,15.884 51.022,13.055 J1.4
SWDIO/TMS: J1.2 J3.7 J4.4 J5.2 J7.4 J8.4 | length 67.6
  Top Layer w0.4: J7.4@6.135,19.798 7.564,19.798 8.456,18.906 8.456,15.786 10.457,13.785 J8.4 10.507,13.778 12.407,13.778 14.629,16 J4.4 18.842,16 19.077,15.766 19.077,9.671 20.874,7.874 J5.2 23.08,6.87 24.172,5.778 29.787,5.778 31.987,7.979 31.987,12.527 34.528,15.068 41.667,15.068 43.044,13.69 J3.7@45.213,13.69 ; J3.7@46.191,13.69 48.259,13.69 50.164,11.785 J1.2
SWO/TDO: J1.6 J3.13 J4.6 J5.6 J8.6 | length 59.8
  Top Layer w0.4: J8.6 13.13,18.865 13.996,18 J4.6 20.405,18 21.203,17.202 21.203,15.682 21.829,15.056 ; J5.6 23.003,10.491 21.437,10.491 20.954,10.974 20.954,14.181 21.829,15.056 ; J1.6 51.212,14.325 48.854,16.683 48.854,18.804 47.245,20.413 47.245,20.84 46.775,21.31 J3.13 43.099,21.31 41.828,20.039 35.215,20.039 34.715,19.538 34.715,18.054 31.717,15.056 21.829,15.056
TDI: J1.8 J3.5 J5.8 | length 41.6
  Top Layer w0.4: J5.8 23.118,11.722 24.783,11.722 25.017,11.956 25.017,13.461 25.703,14.147 30.833,14.147 v1(30.843,14.137) ; v1(33.19,12.417) 41.789,12.417 43.055,11.15 45.213,11.15 45.22,11.157 49.534,11.157 49.973,10.717 54.701,10.717 55.24,11.257 55.24,14.81 54.652,15.399 53.39,15.399 J1.8
  Bottom Layer w0.4: v1(30.843,14.137) 30.843,14.135 32.561,12.416 v1(33.19,12.417)
TRACECLK: J1.12 J2.1 | length 37.1
  Top Layer w0.4: J2.1 24.365,25.2 25.8,26.635 25.8,27.297 26.583,28.08 31.783,28.08 34.738,25.125 47.803,25.125 48.949,23.979 48.949,21.141 51.759,18.331 52.998,18.331 J1.12
TRACED0: J1.14 J2.3 | length 39.7
  Top Layer w0.4: J2.3 23.469,26.862 24.11,26.862 27.683,30.435 33.565,30.435 34.373,29.627 34.373,28.493 35.207,27.659 49.061,27.659 49.658,27.061 49.658,21.697 51.754,19.601 52.998,19.601 J1.14
TRACED1: J1.16 J2.5 | length 39.5
  Top Layer w0.4: J2.5 24.219,28.4 27.356,31.537 47.716,31.537 50.412,28.841 50.412,22.111 51.679,20.844 53.025,20.844 J1.16
TRACED2: J1.18 J2.7 | length 39.4
  Top Layer w0.4: J2.7 24.599,30 27.199,32.6 48.026,32.6 51.129,29.497 51.129,22.518 51.566,22.081 53.058,22.081 J1.18
TRACED3: J1.20 J2.8 | length 38.6
  Top Layer w0.4: J2.8 23.708,30.8 23.758,30.85 23.758,30.927 26.358,33.528 48.516,33.528 52.845,29.198 52.845,23.384 53.014,23.215 J1.20
TRGT_RXD_ISO: D2.A J4.3 J7.3 J8.3 JP1.2 R2.2 | length 28.1
  Top Layer w0.4: J7.3 7.449,18.798 7.683,18.563 7.683,14.062 J8.3 ; R2.2@13.661,7.041 13.768,6.934 14.463,6.934 14.49,6.961 D2.A 14.53,7.685 14.221,7.994 14.221,8.229 14.672,8.845 14.672,9.071 14.583,9.16 14.576,9.167 JP1.2@14.327,9.388 ; R2.2 13.661,7.221 13.663,7.223 13.663,7.655 11.377,9.941 11.377,10.355 10.5,11.232 J8.3 ; J4.3 15.288,15 12.503,12.215 11.503,12.215 10.603,11.314 10.534,11.245 J8.3
TRGT_TXD_ISO: J4.2 J7.2 J8.2 R4.1 U1.1 U1.2 | length 31.3
  Top Layer w0.4: J7.2 5.879,17.758 6.835,17.758 7.03,17.563 7.03,12.176 J8.2 11.731,7.474 U1.1@11.731,3.929 ; R4.1 R4.1@9.752,3.272 ; U1.2 12.109,2.966 10.058,2.966 R4.1@9.752,3.272 ; U1.1 11.751,3.95 U1.1@11.731,3.929 ; v1@15.662,13.307 v1(15.696,13.341) 16.255,13.9 17.333,13.9 J4.2 ; R4.1@9.752,3.272 10.41,3.929 U1.1@11.731,3.929
  Bottom Layer w0.4: J8.2 10.509,8.705 13.661,11.857 14.212,11.857 v1(15.696,13.341)
VSUPPLY: J1.11 J1.13 J3.19 JTAG_VCC.1 | length 24.5
  Top Layer w0.4: J3.19@45.213,28.93 45.232,28.949 48.664,28.949 v1(48.675,28.96) ; v1(53.728,25.734) 55.348,25.734 JTAG_VCC.1@55.351,25.731 ; JTAG_VCC.1 JTAG_VCC.1@55.351,25.731 ; J1.11 55.556,18.135 55.321,18.369 55.321,19.171 ; J1.13 55.556,19.405 55.321,19.171 ; 55.321,19.171 55.288,19.204 55.288,25.667 JTAG_VCC.1@55.351,25.731
  Bottom Layer w0.4: v1(48.675,28.96) 52.258,28.96 53.728,27.49 v1(53.728,25.734)
VTREF: J1.1 J3.1 J3.2 J4.1 J5.1 J7.1 J8.1 R1.1 | length 77.7
  Top Layer w0.508: J7.1 5.469,16.798 5.423,16.752 5.423,15.329 5.157,15.063 5.157,13.133 5.134,13.109 5.209,13.035 5.209,12.085 7.776,9.518 7.776,8.837 9.907,6.706 9.959,6.706 J8.1 ; J4.1 17.424,12.991 v1(17.424,12.106) 17.424,11.328 17.831,10.921 17.831,9.37 22.521,4.68 31.003,4.68 32.381,6.058 v1(32.381,6.07) J3.2 J3.1 52.687,6.07 57.266,10.649 J1.1 ; J5.1 v1(29.134,7.874)
  Bottom Layer w0.508: J8.1 11.041,6.706 11.654,7.319 11.654,7.56 16.2,12.106 v1(17.424,12.106) ; v1(29.134,7.874) 30.577,7.874 v1(32.381,6.07)
VTREF_REG: C1.1 D1.3 R1.2 R2.1 R3.1 U1.5 | length 24.9
  Top Layer w0.3: v1(15.697,3.972) 15.697,3.896 16.165,3.429 16.521,3.429 R3.1
  Top Layer w0.381: R2.1@12.771,7.032 12.771,6.598 13.365,6.003 13.365,5.728 13.483,5.611 C1.1@13.487,5.611
  Top Layer w0.508: R1.2@3.304,13.109 3.304,13.058 3.284,13.038 3.284,11.761 3.581,11.464 3.748,11.464 3.767,11.445 D1.3@3.767,11.125 ; D1.3 4.639,11.213 v1(6.079,9.773) ; C1.1@13.487,5.611 13.535,5.563 13.551,5.563 14.291,4.823 14.291,3.991 14.309,3.972 v1(15.697,3.972)
  Bottom Layer w0.508: v1(6.079,9.773) 7.925,7.927 7.925,5.412 8.7,4.636 11.431,4.636 12.095,3.972 v1(15.697,3.972)
pads on no net: D1.2

## Polygon pours and split planes (outlines as drawn)
GND on Top Layer "GND_L01_P001" (solid, remove dead copper, pour order 1): 0,0 0,35 60,35 60,0
GND on Bottom Layer "GND_L02_P000" (solid, pour order 0): 0,0 0,35 60,35 60,0

## Other copper
Multi-Layer:
  the board outline again, w0.05

## Silkscreen, mask and mechanical layers (free items; w line width, h text height)
Top Overlay:
  drawing of 35 lines, arcs and shapes, not listed
  text "FTDI" at 29.415,34.203 h0.89 r270
  text "10" at 7.798,31.67 h0.89 r270
  text "1" at 33.301,30.962 h0.89 r270
  text "TRACE" at 19.865,30.257 h0.89 r270
  text "PIXHAWK DEBUG ADAPTOR MINI" at 48.463,29.108 h0.81 r270
  text "GND" at 24.845,28.47 h0.89
  text "GND" at 5.881,27.368 h0.89
  text "©" at 33.833,27.074 h2 r270
  text "2016-2020 NscDg" at 33.833,25.545 h1 r270
  text "RST" at 5.926,25.457 h0.89
  text "G1" at 7.054,23.678 h0.89
  text "TX" at 24.219,21.086 h0.89
  text "G2" at 6.865,20.896 h0.89
  text "RX" at 24.307,18.545 h0.89
  text "SO" at 6.868,18.403 h0.89
  text "712040-200-01" at 50.292,18.235 h0.9 r270
  text "SC" at 6.869,16.067 h0.89
  text "6" at 25.224,15.638 h0.89 r270
  text "SD" at 6.813,13.377 h0.89
  text "RX" at 6.72,10.776 h0.89
  text "TX" at 6.715,8.251 h0.89
  text "GND" at 34.164,6.864 h0.89 r270
  text "RST" at 31.483,6.776 h0.89 r270
  text "VT" at 6.821,5.956 h0.89
  text "1" at 7.798,4.247 h0.89 r270
  text "RST" at 19.009,3.789 h1 r270
Mechanical 01 Board Outline:
  the board outline again, w0.05
Branding Top Overlay:
  the board outline again, w0.05

## Dimensions
0,0 to 4,31 on Mechanical 01 Board Outline
0,0 to 4,4 on Mechanical 01 Board Outline
0,0 to 56,4 on Mechanical 01 Board Outline
0,0 to 4,4 on Mechanical 01 Board Outline
0,35 to 0,0 on Mechanical 01 Board Outline
0,0 to 60,0 on Mechanical 01 Board Outline